# Altium PCB PCB.PcbDoc (part 1 of 3)
Units mm, origin at the board's own origin, x right, y up, seen from the top; angles counter-clockwise.
Board outline 103.89 x 68.2 mm, 6 copper layers (Top Layer, GND1, Internal 1, VCC, Internal 2, Bottom Layer), stack 0.851 mm thick; 117 components, 96 nets, 737 pads, 258 vias.
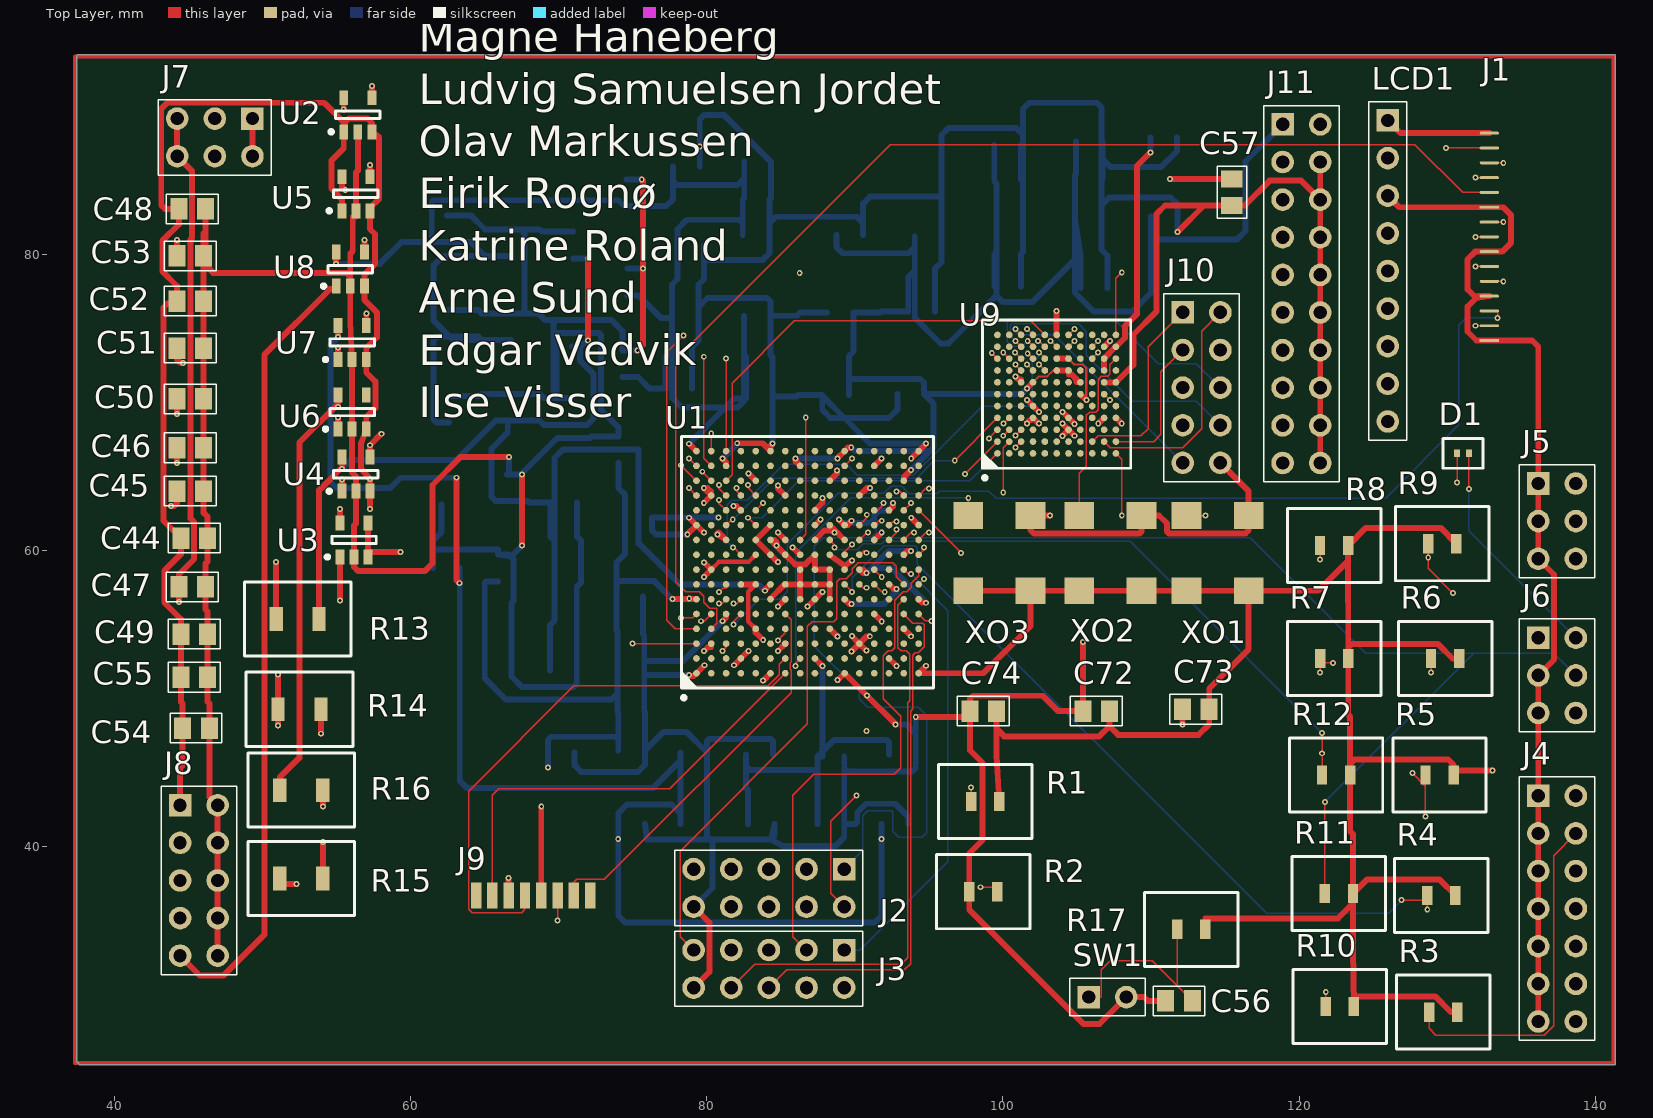
[diagram p0: Top Layer view]
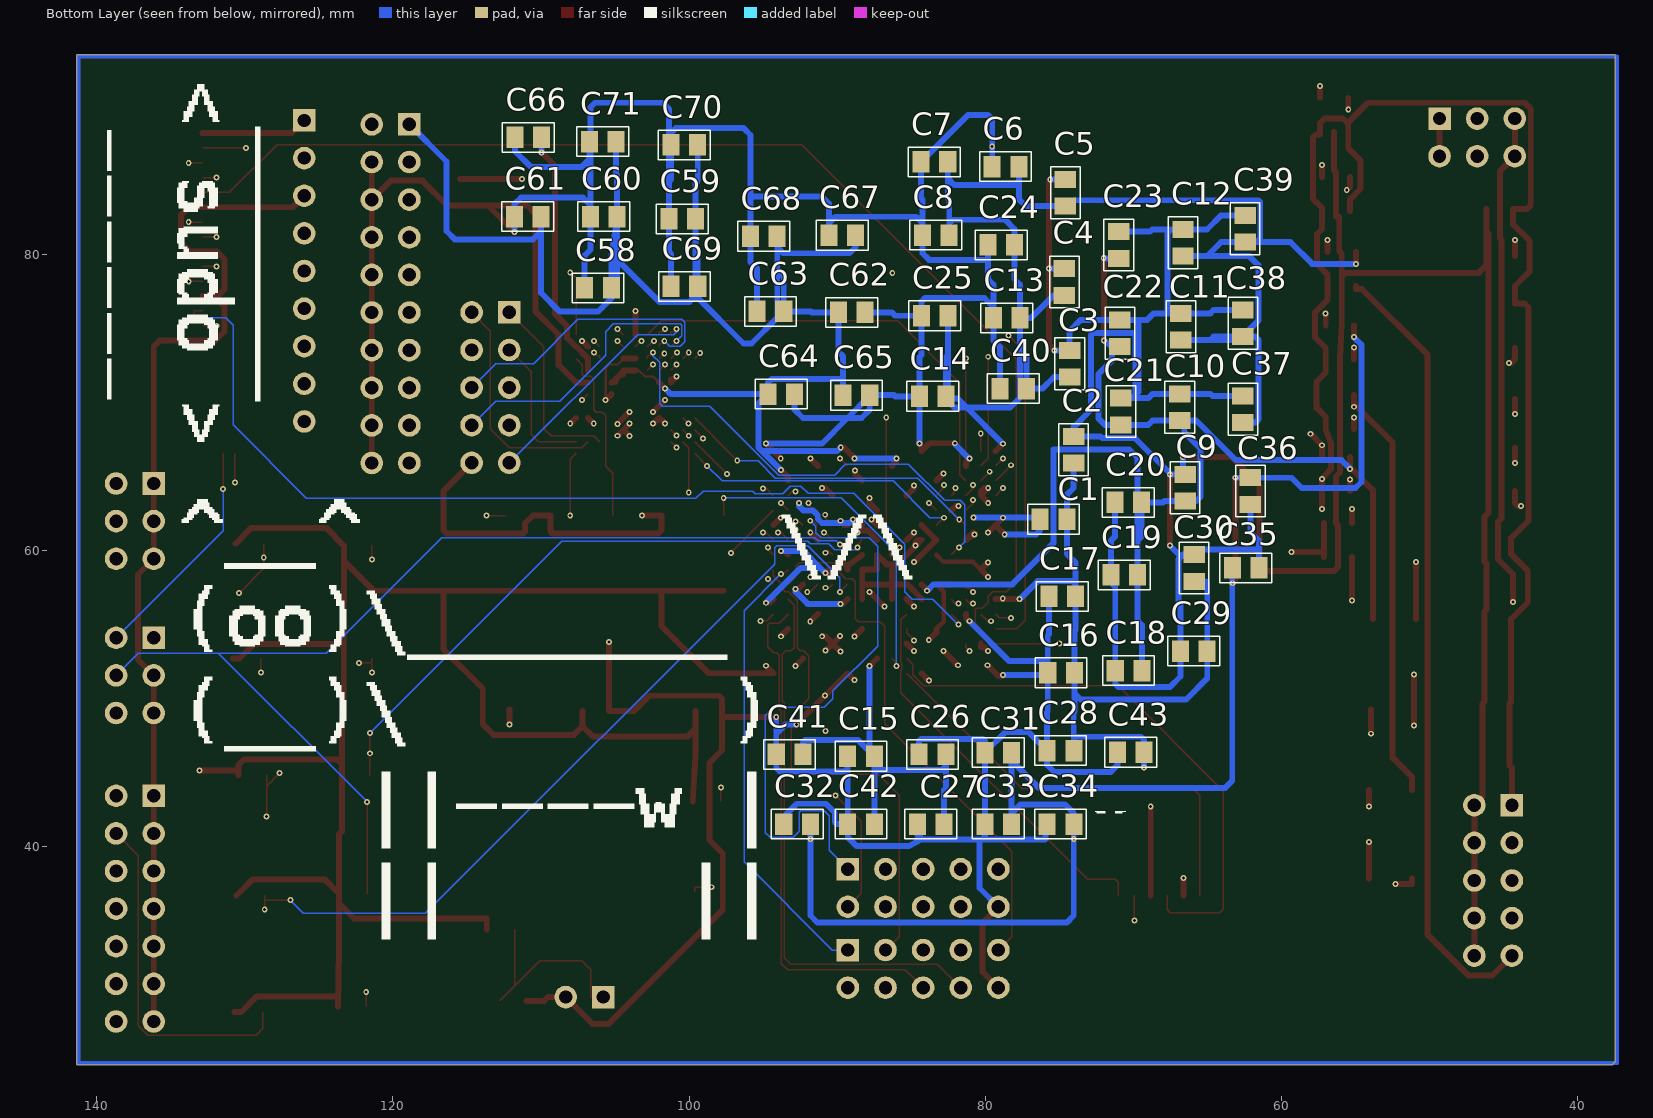
[diagram p1: Bottom Layer view, seen from below]
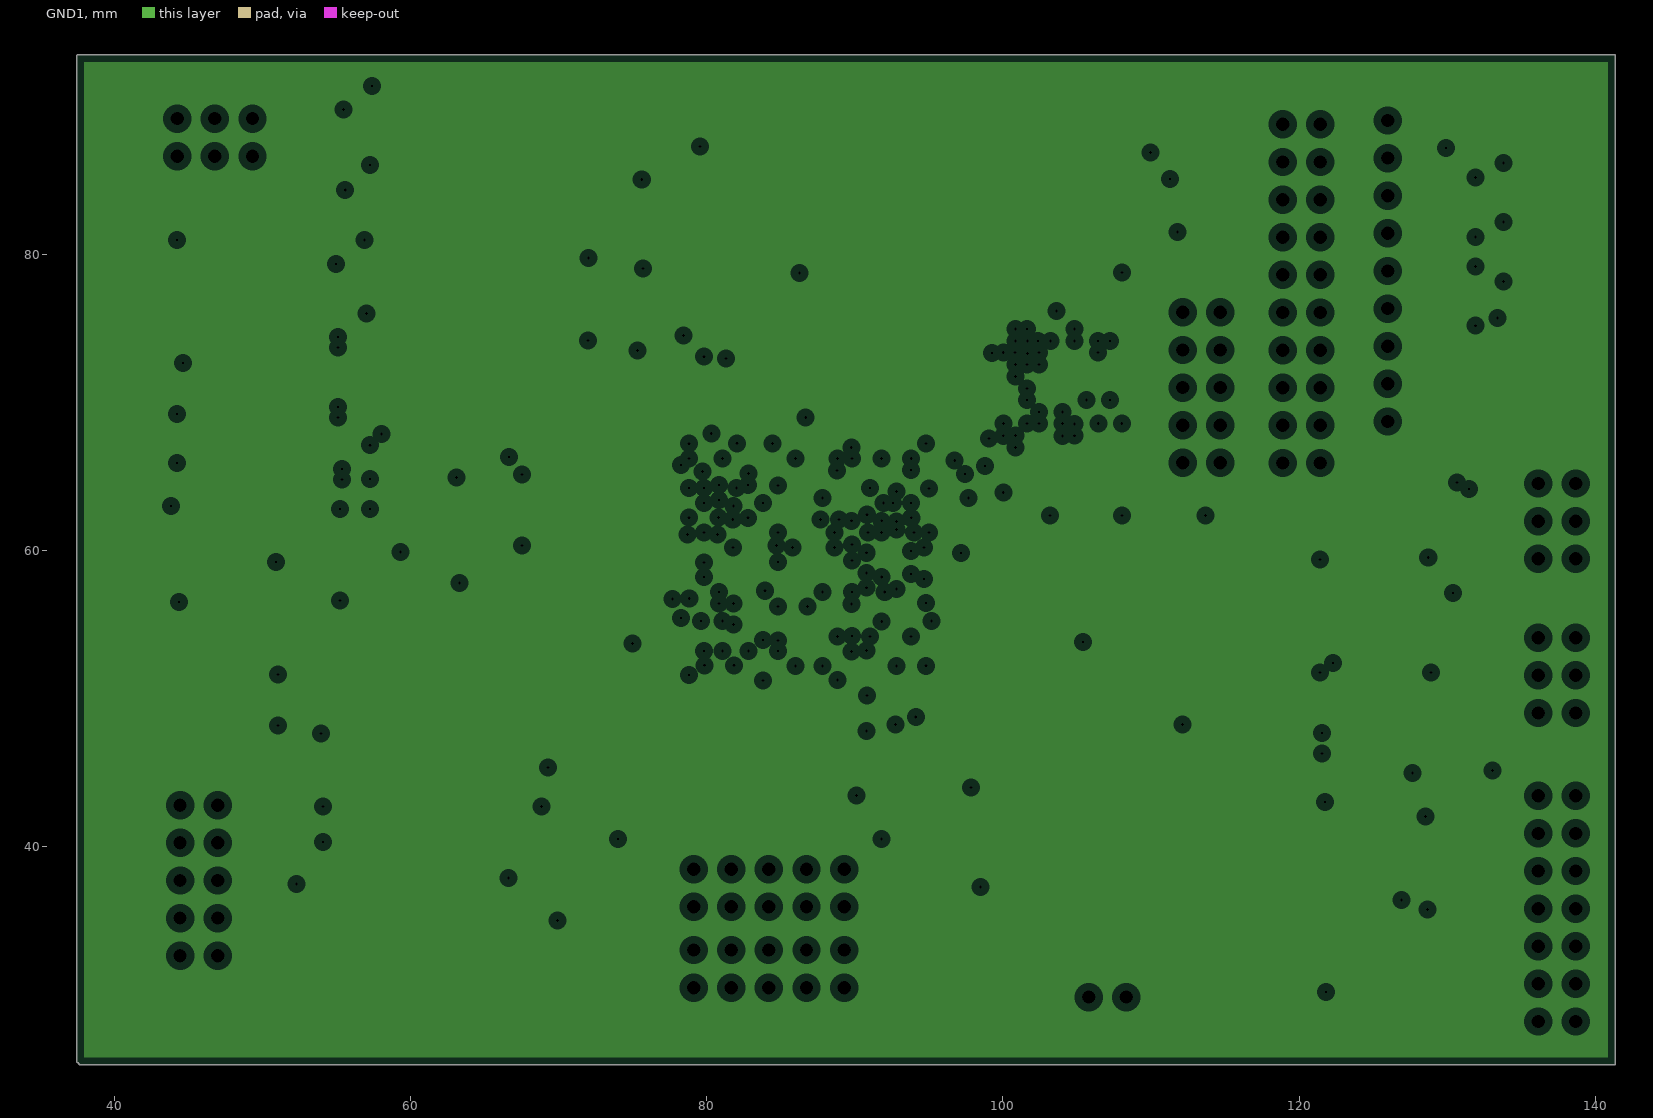
[diagram p2: GND1, clearances drawn from the general rule]
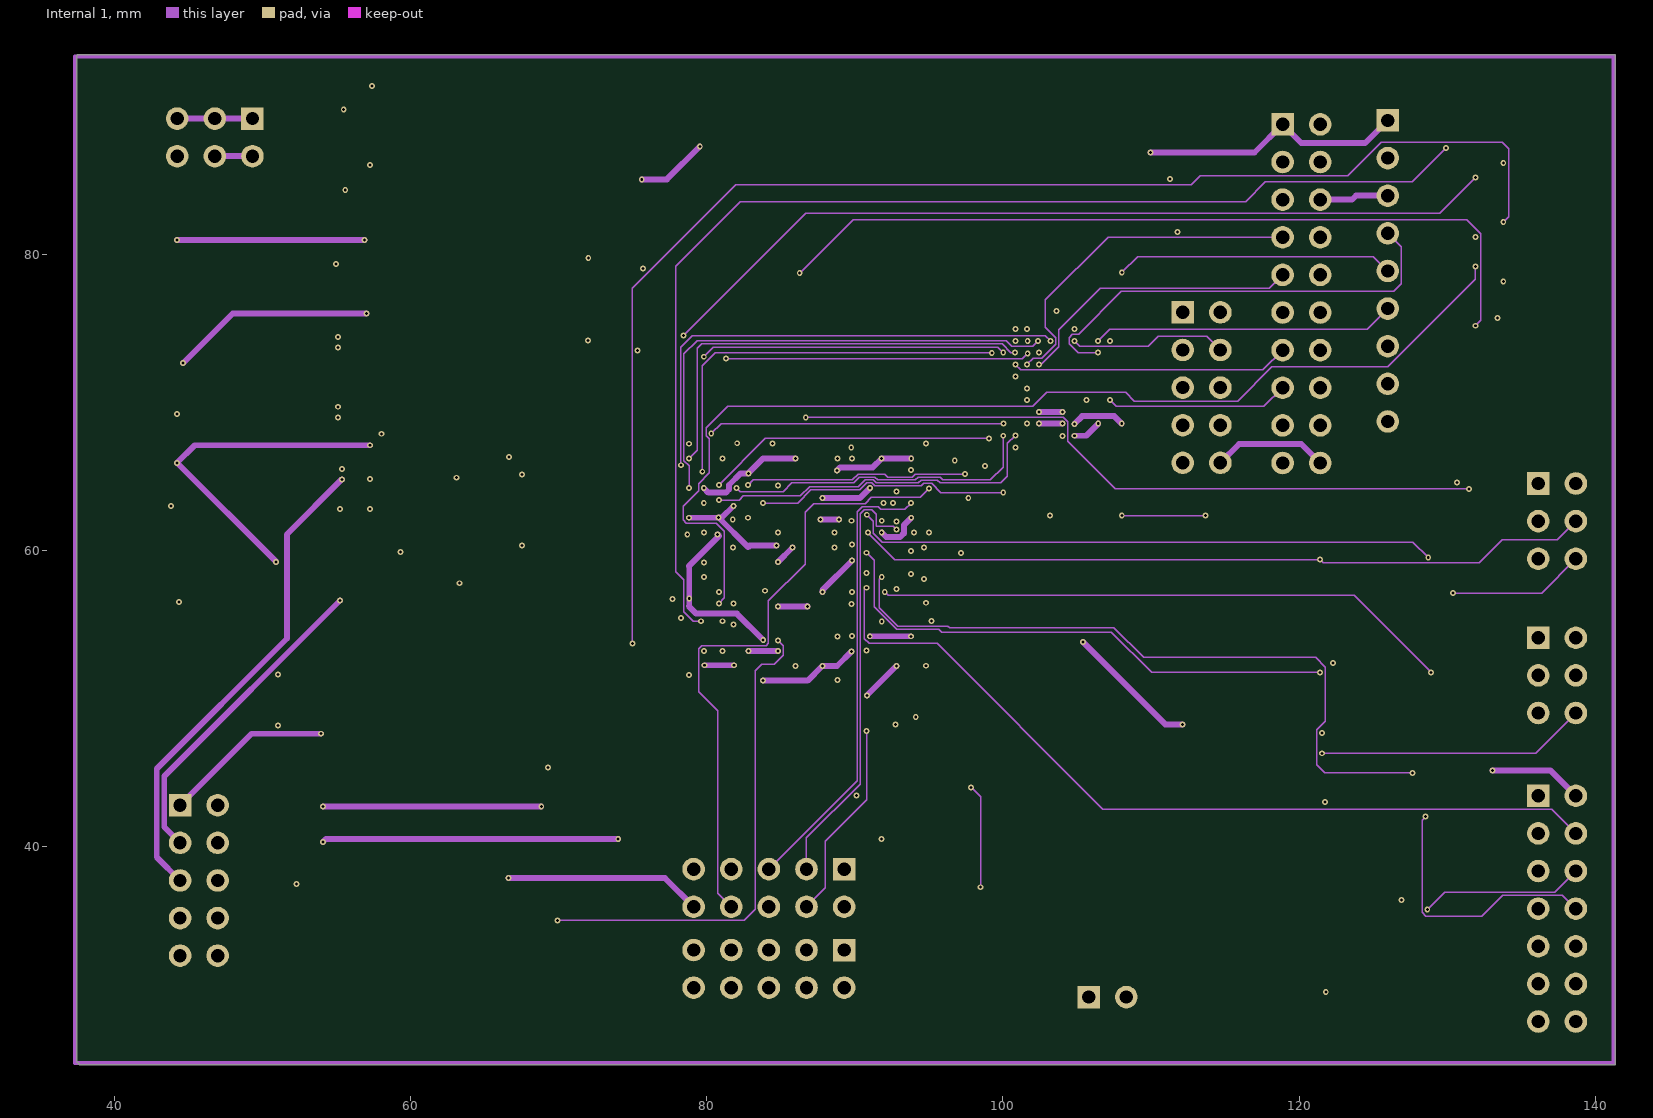
[diagram p3: Internal 1]
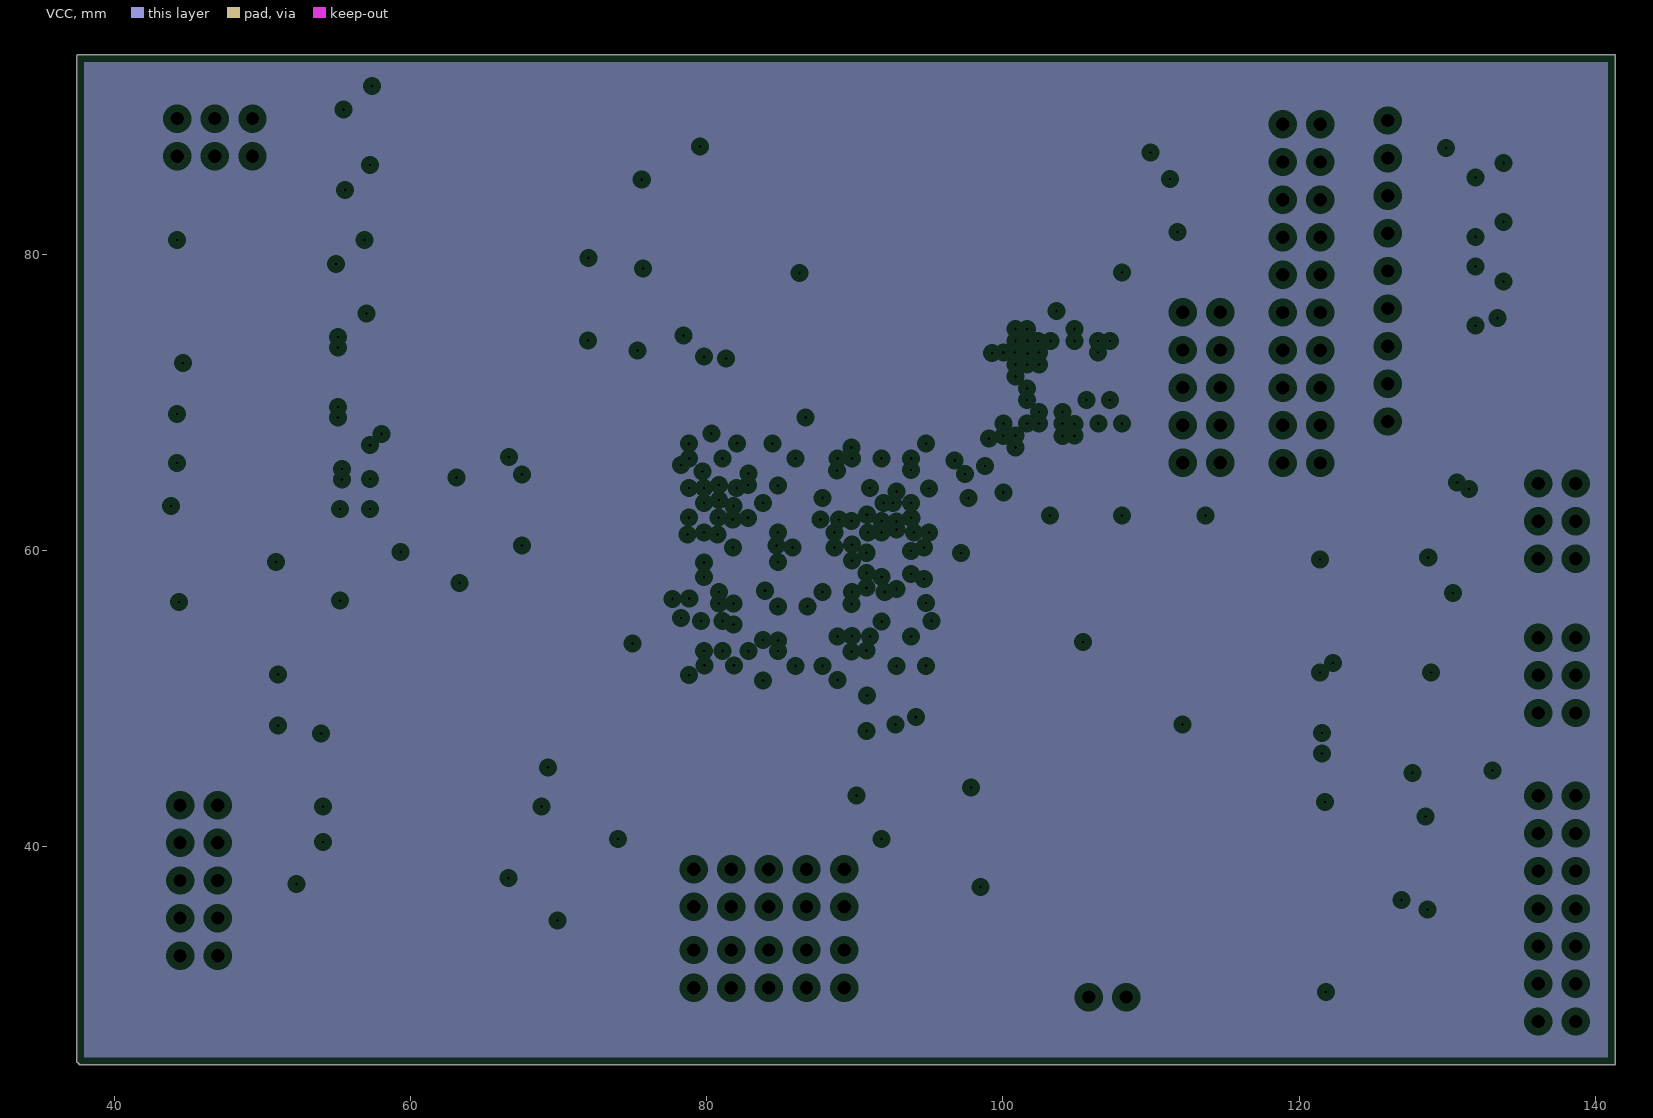
[diagram p4: VCC, clearances drawn from the general rule]
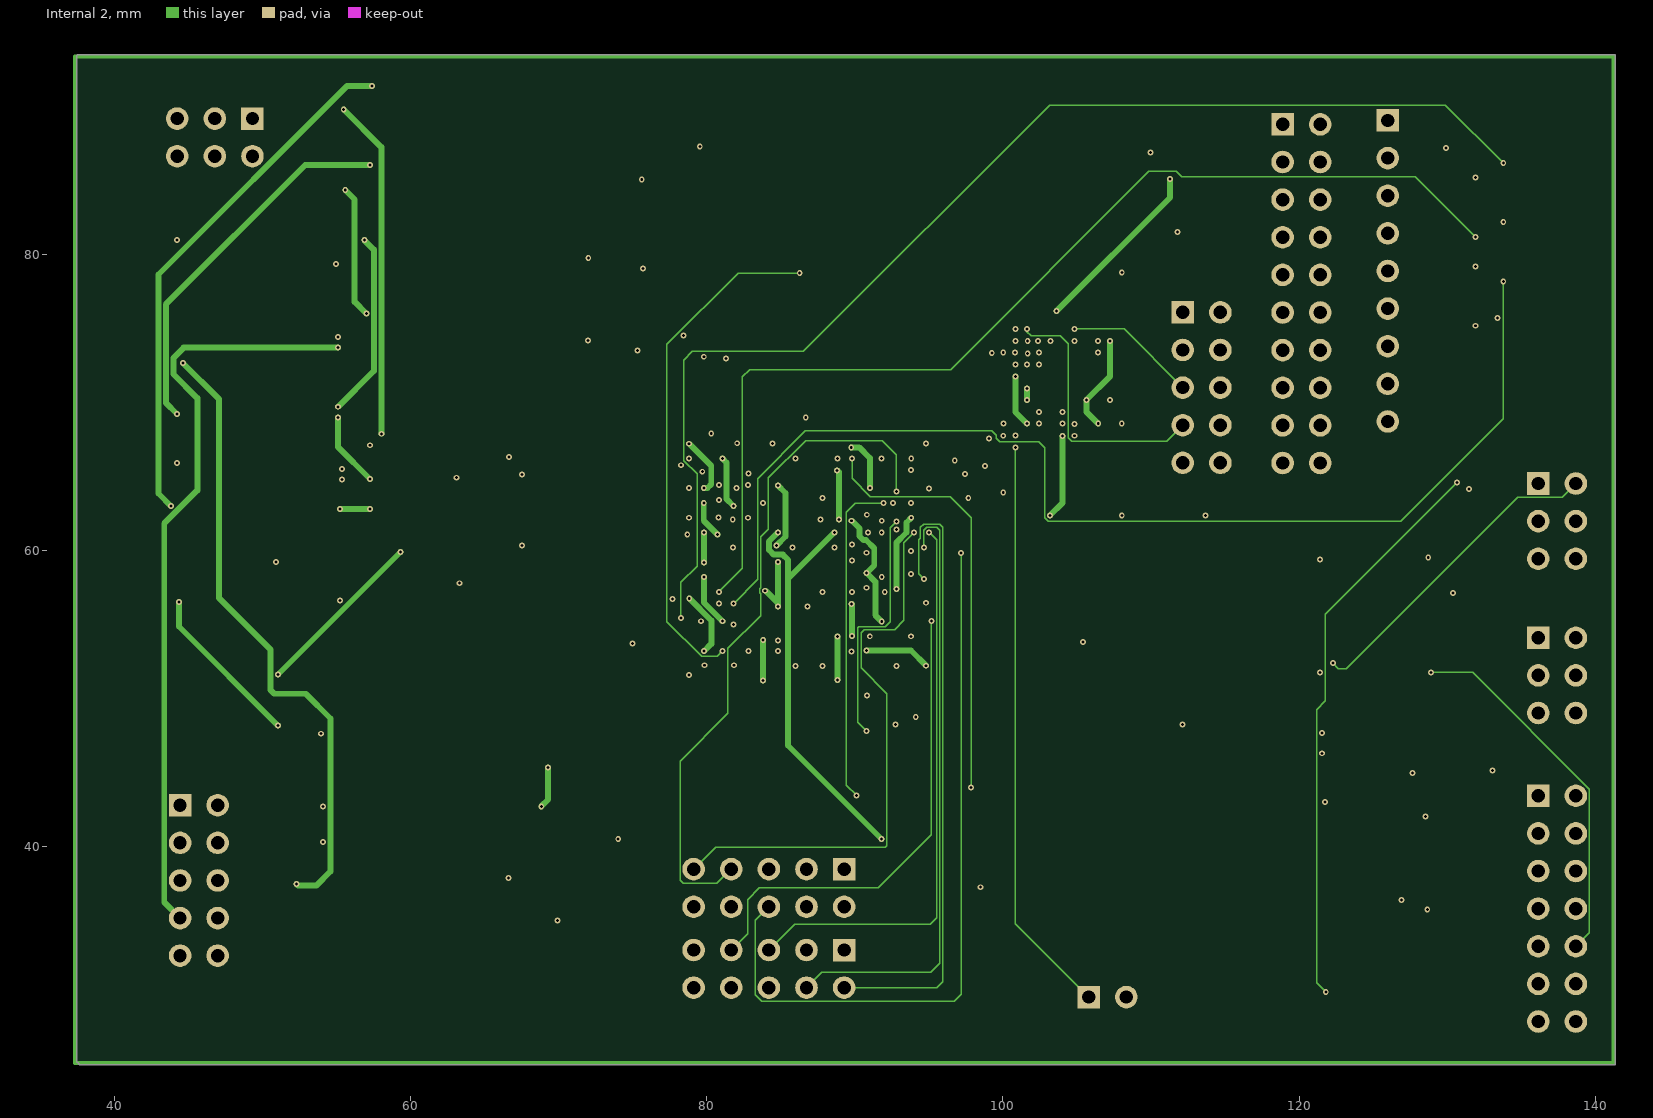
[diagram p5: Internal 2]

## Layer stack, top to bottom
Top Solder: solder mask 0.01, Solder Resist, Dk 3.5
Top Layer: signal copper 0.036
Dielectric 1: prepreg 0.127, FR-4, Dk 4.2
GND1: plane copper 0.036
Dielectric 2: prepreg 0.127, Dk 4.2
Internal 1: signal copper 0.036
Dielectric 3: prepreg 0.127, Dk 4.2
VCC: plane copper 0.036
Dielectric 5: prepreg 0.127, Dk 4.2
Internal 2: signal copper 0.036
Dielectric 6: prepreg 0.127, Dk 4.2
Bottom Layer: signal copper 0.036
Bottom Solder: solder mask 0.01, Solder Resist, Dk 3.5

## Board outline
37.592,25.4 cw(c37.592,25.527) 37.465,25.527 37.465,93.345 cw(c37.592,93.345) 37.592,93.473 141.351,93.473 141.351,25.273 37.719,25.273 cw(c37.719,25.4)

## Design rules (kind name [scope] priority, off if disabled: settings)
Clearance [All] p1: gap=0.1
HoleSize [All] p1: absolutevalues=TRUE maxlimit=3 minlimit=0.2 maxpercent=80.000 minpercent=20.000
HoleToHoleClearance [All] p1: gap=0.254 allowstackedmicrovias=FALSE
MinimumAnnularRing [All] p1: minimumring=0.1
MinimumSolderMaskSliver [All] p1: minsoldermaskwidth=0.03
PlaneClearance [All] p1: clearance=0.508
PlaneConnect [All] p1: planeconnectstyle=Relief reliefexpansion=0.508 reliefentries=4 reliefconductorwidth=0.254 reliefairgap=0.254
PolygonConnect [All] p1: connectstyle=Relief reliefconductorwidth=0.254 reliefentries=4 polygonreliefangle="90 Angle" airgapwidth=0.254
RoomDefinition dmpro16-pcb-v1-MCU-Power [InComponentClass('dmpro16-pcb-v1-MCU-Power')] p1: confinementstyle=ConfineIn formatcopy=TRUE lockcomponents=FALSE outline 85.852,68.707 114.035,68.707 114.035,91.186 85.852,91.186
RoomDefinition dmpro16-pcb-v1-FPGA-Power [InComponentClass('dmpro16-pcb-v1-FPGA-Power')] p2: confinementstyle=ConfineIn formatcopy=TRUE lockcomponents=FALSE outline 96.266,39.116 96.266,91.948 60.579,91.948 60.579,39.116
RoomDefinition dmpro16-pcb-v1-CameraBoard [InComponentClass('dmpro16-pcb-v1-CameraBoard')] p3: confinementstyle=ConfineIn formatcopy=TRUE lockcomponents=FALSE outline 131.953,71.12 139.573,71.12 139.573,92.075 131.953,92.075
RoomDefinition dmpro16-pcb-v1-UserInput [InComponentClass('dmpro16-pcb-v1-UserInput')] p4: confinementstyle=ConfineIn formatcopy=TRUE lockcomponents=FALSE outline 118.745,39.116 103.505,39.116 103.505,26.3 118.745,26.3
RoomDefinition dmpro16-pcb-v1-SystemClock [InComponentClass('dmpro16-pcb-v1-SystemClock')] p5: confinementstyle=ConfineIn formatcopy=TRUE lockcomponents=FALSE outline 96.404,45.974 118.491,45.974 118.491,63.881 96.404,63.881
RoomDefinition dmpro16-pcb-v1-SDcard [InComponentClass('dmpro16-pcb-v1-SDcard')] p6: confinementstyle=ConfineIn formatcopy=TRUE lockcomponents=FALSE outline 62.738,25.4 75.184,25.4 75.184,40.386 62.738,40.386
RoomDefinition dmpro16-pcb-v1-PowerSupply [InComponentClass('dmpro16-pcb-v1-PowerSupply')] p7: confinementstyle=ConfineIn formatcopy=TRUE lockcomponents=FALSE outline 58.293,27.94 58.293,92.336 37.78,92.336 37.78,27.94
RoomDefinition dmpro16-pcb-v1-MCU-GPIO [InComponentClass('dmpro16-pcb-v1-MCU-GPIO')] p8: confinementstyle=ConfineIn formatcopy=TRUE lockcomponents=FALSE outline 123.329,64.25 123.329,90.678 97.79,90.678 97.79,64.25
RoomDefinition dmpro16-pcb-v1-FPGA-Config [InComponentClass('dmpro16-pcb-v1-FPGA-Config')] p9: confinementstyle=ConfineIn formatcopy=TRUE lockcomponents=FALSE outline 140.843,25.781 140.843,70.485 118.491,70.485 118.491,25.781
RoomDefinition dmpro16-pcb-v1-FPGA-Bank14 [InComponentClass('dmpro16-pcb-v1-FPGA-Bank14')] p10: confinementstyle=ConfineIn formatcopy=TRUE lockcomponents=FALSE outline 102.743,28.956 102.743,69.215 75.057,69.215 75.057,28.956
RoomDefinition dmpro16-pcb-v1-DisplayBoard [InComponentClass('dmpro16-pcb-v1-DisplayBoard')] p11: confinementstyle=ConfineIn formatcopy=TRUE lockcomponents=FALSE outline 127.508,91.186 123.571,91.186 123.571,64.643 127.508,64.643
RoutingVias [All] p1: holewidth=0.2 width=0.4 viastyle="Through Hole" minholewidth=0.2 minwidth=1.4 maxholewidth=1 maxwidth=3
SilkToSilkClearance [All] p1: silktosilkclearance=0
SilkToSolderMaskClearance [IsPad] p1: minsilkscreentomaskgap=0.1 clearancetoexposedcopper=TRUE
SolderMaskExpansion [All] p1: expansion=0.102
Width WidthPower [InNetClass('Power')] p1: maxlimit=0.5 minlimit=0.1 preferedwidth=0.4
Width [All] p2: maxlimit=5 minlimit=0.1 preferedwidth=0.1 minimp=50.000000 maximp=50.000000 favimp=50.000000
23 further rules are at their usual default settings.

## Classes and differential pairs
net class Power: GND ISENS_1V0 ISENS_1V8 ISENS_3V3 ISENS_UNREG NetC45_2 NetC46_2 NetC50_2 NetC51_2 NetC53_2 NetC57_2 V_UNREG VCC_1V0 VCC_1V8 VCC_3V3 VCC_IN
net class TP3-[1..9]: TP3-1 TP3-2 TP3-3 TP3-4 TP3-5 TP3-6 TP3-7 TP3-8 TP3-9
net class TP2-[1..9]: TP2-1 TP2-2 TP2-3 TP2-4 TP2-5 TP2-6 TP2-7 TP2-8 TP2-9
net class TP1-[1..9]: TP1-1 TP1-2 TP1-3 TP1-4 TP1-5 TP1-6 TP1-7 TP1-8 TP1-9
component class dmpro16-pcb-v1-UserInput: C56 R17 SW1
component class dmpro16-pcb-v1-SystemClock: C72 C73 C74 XO1 XO2 XO3
component class dmpro16-pcb-v1-SDcard: J9
component class dmpro16-pcb-v1-PowerSupply: C44 C45 C46 C47 C48 C49 C50 C51 C52 C53 C54 C55 J7 J8 R13 R14 R15 R16 U2 U3 U4 U5 U6 U7 U8
component class dmpro16-pcb-v1-MCU-Power: C58 C59 C60 C61 C62 C63 C64 C65 C66 C67 C68 C69 C70 C71
component class dmpro16-pcb-v1-MCU-GPIO: C57 J10 J11 U9
component class dmpro16-pcb-v1-FPGA-Power: C1 C2 C3 C4 C5 C6 C7 C8 C9 C10 C11 C12 C13 C14 C15 C16 C17 C18 C19 C20 C21 C22 C23 C24 C25 C26 C27 C28 C29 C30 C31 C32 C33 C34 C35 C36 C37 C38 C39 C40 C41 C42 C43
component class dmpro16-pcb-v1-FPGA-Config: D1 J4 J5 J6 R3 R4 R5 R6 R7 R8 R9 R10 R11 R12
component class dmpro16-pcb-v1-FPGA-Bank14: J2 J3 R1 R2
component class dmpro16-pcb-v1-DisplayBoard: LCD1
component class dmpro16-pcb-v1-CameraBoard: J1

## Components (designator, comment, footprint, x,y, rotation, side; value= is the part's Value field where it differs from the comment)
C1 "#NAME?" CAPC2012_0h50 75.402,62.1 r180 bottom
C2 "#NAME?" CAPC2012_0h50 74.041,66.802 r270 bottom
C3 "#NAME?" CAPC2012_0h50 74.3,72.61 r270 bottom
C4 "#NAME?" CAPC2012_0h50 74.667,78.121 r270 bottom
C5 "#NAME?" CAPC2012_0h50 74.594,84.148 r270 bottom
C6 "#NAME?" CAPC2012_0h50 78.636,85.912 r180 bottom
C7 "#NAME?" CAPC2012_0h50 83.439,86.233 r180 bottom
C8 "#NAME?" CAPC2012_0h50 83.339,81.282 r180 bottom
C9 "#NAME?" CAPC2012_0h50 66.51,64.232 r270 bottom
C10 "#NAME?" CAPC2012_0h50 66.877,69.67 r270 bottom
C11 "#NAME?" CAPC2012_0h50 66.804,75.108 r270 bottom
C12 "#NAME?" CAPC2012_0h50 66.657,80.767 r270 bottom
C13 "#NAME?" CAPC2012_0h50 78.562,75.696 r180 bottom
C14 "#NAME?" CAPC2012_0h50 83.56,70.405 r180 bottom
C15 "#NAME?" CAPC2012_0h50 88.392,46.101 r180 bottom
C16 "#NAME?" CAPC2012_0h50 74.888,51.738 r180 bottom
C17 "#NAME?" CAPC2012_0h50 74.803,56.896 r180 bottom
C18 "#NAME?" CAPC2012_0h50 70.331,51.885 r180 bottom
C19 "#NAME?" CAPC2012_0h50 70.625,58.352 r180 bottom
C20 "#NAME?" CAPC2012_0h50 70.358,63.246 r180 bottom
C21 "#NAME?" CAPC2012_0h50 70.846,69.376 r270 bottom
C22 "#NAME?" CAPC2012_0h50 70.919,74.667 r270 bottom
C23 "#NAME?" CAPC2012_0h50 70.993,80.62 r270 bottom
C24 "#NAME?" CAPC2012_0h50 78.93,80.62 r180 bottom
C25 "#NAME?" CAPC2012_0h50 83.413,75.843 r180 bottom
C26 "#NAME?" CAPC2012_0h50 83.566,46.228 r180 bottom
C27 "#NAME?" CAPC2012_0h50 83.693,41.529 r180 bottom
C28 "#NAME?" CAPC2012_0h50 74.93,46.482 r180 bottom
C29 "#NAME?" CAPC2012_0h50 65.922,53.208 r180 bottom
C30 "#NAME?" CAPC2012_0h50 65.913,58.812 r270 bottom
C31 "#NAME?" CAPC2012_0h50 79.121,46.355 r180 bottom
C32 "#NAME?" CAPC2012_0h50 92.71,41.529 r180 bottom
C33 "#NAME?" CAPC2012_0h50 79.121,41.529 r180 bottom
C34 "#NAME?" CAPC2012_0h50 74.93,41.529 r180 bottom
C35 "#NAME?" CAPC2012_0h50 62.43,58.818 r0 bottom
C36 "#NAME?" CAPC2012_0h50 62.103,64.008 r90 bottom
C37 "#NAME?" CAPC2012_0h50 62.615,69.523 r270 bottom
C38 "#NAME?" CAPC2012_0h50 62.615,75.329 r270 bottom
C39 "#NAME?" CAPC2012_0h50 62.468,81.723 r270 bottom
C40 "#NAME?" CAPC2012_0h50 78.121,70.919 r180 bottom
C41 "#NAME?" CAPC2012_0h50 93.218,46.228 r180 bottom
C42 "#NAME?" CAPC2012_0h50 88.392,41.529 r180 bottom
C43 "#NAME?" CAPC2012_0h50 70.184,46.373 r180 bottom
C44 "#NAME?" CAPC2012_0h50 45.4,60.833 r180 top
C45 "#NAME?" CAPC2012_0h50 45.146,64.008 r180 top
C46 "#NAME?" CAPC2012_0h50 45.146,66.929 r180 top
C47 "#NAME?" CAPC2012_0h50 45.273,57.531 r180 top
C48 "#NAME?" CAPC2012_0h50 45.273,83.058 r180 top
C49 "#NAME?" CAPC2012_0h50 45.4,54.356 r180 top
C50 "#NAME?" CAPC2012_0h50 45.146,70.231 r180 top
C51 "#NAME?" CAPC2012_0h50 45.146,73.66 r180 top
C52 "#NAME?" CAPC2012_0h50 45.146,76.835 r180 top
C53 "#NAME?" CAPC2012_0h50 45.146,79.883 r180 top
C54 "#NAME?" CAPC2012_0h50 45.527,48.006 r180 top
C55 "#NAME?" CAPC2012_0h50 45.4,51.435 r180 top
C56 "#NAME?" CAPC2012_0h50 111.887,29.591 r0 top
C57 "#NAME?" CAPC2012_0h50 115.455,84.189 r90 top
C58 "#NAME?" CAPC2012_0h50 106.15,77.724 r180 bottom
C59 "#NAME?" CAPC2012_0h50 100.463,82.384 r180 bottom
C60 "#NAME?" CAPC2012_0h50 105.754,82.531 r180 bottom
C61 "#NAME?" CAPC2012_0h50 110.899,82.531 r180 bottom
C62 "#NAME?" CAPC2012_0h50 89.027,76.073 r0 bottom
C63 "#NAME?" CAPC2012_0h50 94.51,76.137 r180 bottom
C64 "#NAME?" CAPC2012_0h50 93.775,70.552 r0 bottom
C65 "#NAME?" CAPC2012_0h50 88.704,70.478 r0 bottom
C66 "#NAME?" CAPC2012_0h50 110.86,87.884 r180 bottom
C67 "#NAME?" CAPC2012_0h50 89.662,81.28 r180 bottom
C68 "#NAME?" CAPC2012_0h50 94.951,81.208 r180 bottom
C69 "#NAME?" CAPC2012_0h50 100.316,77.828 r180 bottom
C70 "#NAME?" CAPC2012_0h50 100.319,87.376 r180 bottom
C71 "#NAME?" CAPC2012_0h50 105.828,87.602 r180 bottom
C72 "#NAME?" CAPC2012_0h50 106.299,49.149 r0 top
C73 "#NAME?" CAPC2012_0h50 113.03,49.276 r0 top
C74 "#NAME?" CAPC2012_0h50 98.679,49.149 r0 top
D1 "LED" LED 131.064,66.548 r180 top
J1 "Header 1x15pin" ZIF-15 132.842,74.168 r90 top
J2 "Testpoints #2" HEADER_2X5 89.281,38.481 r180 top
J3 "Testpoints #3" HEADER_2X5 89.281,33.02 r180 top
J4 "FPGA JTAG" HEADER_2X7 136.144,43.434 r270 top
J5 "FPGA Config Mode" HEADER_2X3 136.144,64.516 r270 top
J6 "FPGA Status" HEADER_2X3 136.144,54.102 r270 top
J7 "Power input" HEADER_2X3 49.337,89.154 r180 top
J8 "Current sense hdr" HEADER_2X5 44.45,42.799 r270 top
J9 "microSD" 114-00841-68-1-ND 72.136,36.703 r0 top
J10 "Testpoints #1" HEADER_2X5 112.141,76.073 r270 top
J11 "Header 2x10pin" HEADER_2X10 118.884,88.761 r270 top
LCD1 "eINK Display" HEADER_1X9 125.984,89.027 r270 top
R1 "10 kOhm" "Resistor 2012" 98.806,43.053 r180 top
R2 "10 kOhm" "Resistor 2012" 98.679,36.957 r180 top
R3 "10 kOhm" "Resistor 2012" 129.728,28.829 r180 top
R4 "10 kOhm" "Resistor 2012" 129.601,36.703 r180 top
R5 "10 kOhm" "Resistor 2012" 129.479,44.831 r180 top
R6 "10 kOhm" "Resistor 2012" 129.855,52.705 r180 top
R7 "10 kOhm" "Resistor 2012" 122.367,52.705 r180 top
R8 "10 kOhm" "Resistor 2012" 122.362,60.325 r180 top
R9 "10 kOhm" "Resistor 2012" 129.667,60.452 r180 top
R10 "150 Ohm" "Resistor 2012" 122.748,29.21 r180 top
R11 "10 kOhm" "Resistor 2012" 122.682,36.83 r180 top
R12 "10 kOhm" "Resistor 2012" 122.494,44.831 r180 top
R13 "" "Resistor 3216" 52.385,55.372 r180 top
R14 "" "Resistor 3216" 52.512,49.276 r180 top
R15 "" "Resistor 3216" 52.639,37.846 r180 top
R16 "" "Resistor 3216" 52.639,43.815 r180 top
R17 "10 kOhm" "Resistor 2012" 112.71,34.417 r180 top
SW1 "SPST Push Button" HEADER_1X2 105.791,29.845 r0 top
U1 "XC7A35T-2FTG256C" FTG256 86.812,59.206 r90 top
U2 "LDK130 1.0V LDO" SOT23-5-127P600-8N 56.449,89.408 r90 top
U3 "INA196/197/198" SOT23-5-127P600-8N 56.195,60.706 r90 top
U4 "INA196/197/198" SOT23-5-127P600-8N 56.322,65.151 r90 top
U5 "LDK130 1.8V LDO" SOT23-5-127P600-8N 56.322,84.074 r90 top
U6 "LDK220 3.3V LDO" SOT23-5-127P600-8N 56.068,69.342 r90 top
U7 "INA196/197/198" SOT23-5-127P600-8N 56.068,74.041 r90 top
U8 "INA196/197/198" SOT23-5-127P600-8N 55.941,78.994 r90 top
U9 "EFM32GG990F1024-BGA112" ENMR-BGA112 103.632,70.548 r90 top
XO1 "32.768kHz oscillator" FXO-HC73 117.611,56.388 r180 top
XO2 "48MHz oscillator" FXO-HC73 110.372,56.388 r180 top
XO3 "48MHz oscillator" FXO-HC73 102.879,56.388 r180 top

## Footprints (in the part's own frame and the unit in brackets; to place one, negate y for a bottom-side part, rotate by r counter-clockwise, add the part's x,y. Pads: shape width x height; smd on the part's side, far side on the other; paste and mask are expansions set on the pad)
114-00841-68-1-ND [mm]
  rect 0.7x1.75 smd: 1(0,0) 2(-1.1,0) 3(-2.2,0) 4(-3.3,0) 5(-4.4,0) 6(-5.5,0) 7(-6.6,0) 8(-7.7,0)
  body extent -9.22,-11.12 2.8,0.38, height 0.05
CAPC2012_0h50 [mm]
  rect 1.15x1.45 smd: 1(-0.9,0) 2(0.9,0)
  silkscreen extent -1.75,-1 1.75,1, body extent -1,-0.62 1,0.63, height 0.5
ENMR-BGA112 [mm] "BGA, 112-Balls, Body 10x10mm, Pitch 0.8mm"
  round 0.45 smd: A1(-4,4) A2(-3.2,4) A3(-2.4,4) A4(-1.6,4) A5(-0.8,4) A6(0,4) A7(0.8,4) A8(1.6,4) A9(2.4,4) A10(3.2,4) A11(4,4) B1(-4,3.2) B2(-3.2,3.2) B3(-2.4,3.2) B4(-1.6,3.2) B5(-0.8,3.2) B6(0,3.2) B7(0.8,3.2) B8(1.6,3.2) B9(2.4,3.2) B10(3.2,3.2) B11(4,3.2) C1(-4,2.4) C2(-3.2,2.4) C3(-2.4,2.4) C4(-1.6,2.4) C5(-0.8,2.4) C6(0,2.4) C7(0.8,2.4) C8(1.6,2.4) C9(2.4,2.4) C10(3.2,2.4) C11(4,2.4) D1(-4,1.6) D2(-3.2,1.6) D3(-2.4,1.6) D4(-1.6,1.6) D5(-0.8,1.6) D6(0,1.6) D7(0.8,1.6) D8(1.6,1.6) D9(2.4,1.6) D10(3.2,1.6) D11(4,1.6) E1(-4,0.8) E2(-3.2,0.8) E3(-2.4,0.8) E4(-1.6,0.8) E5(-0.8,0.8) E6(0,0.8) E7(0.8,0.8) E8(1.6,0.8) E9(2.4,0.8) E10(3.2,0.8) E11(4,0.8) F1(-4,0) F2(-3.2,0) F3(-2.4,0) F4(-1.6,0) F5(-0.8,0) F6(0,0) F7(0.8,0) F8(1.6,0) F9(2.4,0) F10(3.2,0) F11(4,0) G1(-4,-0.8) G2(-3.2,-0.8) G3(-2.4,-0.8) G4(-1.6,-0.8) G5(-0.8,-0.8) G6(0,-0.8) G7(0.8,-0.8) G8(1.6,-0.8) G9(2.4,-0.8) G10(3.2,-0.8) G11(4,-0.8) H1(-4,-1.6) H2(-3.2,-1.6) H3(-2.4,-1.6) H4(-1.6,-1.6) H5(-0.8,-1.6) H6(0,-1.6) H7(0.8,-1.6) H8(1.6,-1.6) H9(2.4,-1.6) H10(3.2,-1.6) H11(4,-1.6) J1(-4,-2.4) J2(-3.2,-2.4) J3(-2.4,-2.4) J4(-1.6,-2.4) J5(-0.8,-2.4) J6(0,-2.4) J7(0.8,-2.4) J8(1.6,-2.4) J9(2.4,-2.4) J10(3.2,-2.4) J11(4,-2.4) K1(-4,-3.2) K2(-3.2,-3.2) K3(-2.4,-3.2) K4(-1.6,-3.2) K5(-0.8,-3.2) K6(0,-3.2) K7(0.8,-3.2) K8(1.6,-3.2) K9(2.4,-3.2) K10(3.2,-3.2) K11(4,-3.2) L1(-4,-4) L2(-3.2,-4) L3(-2.4,-4) L4(-1.6,-4) L5(-0.8,-4) L6(0,-4) L7(0.8,-4) L8(1.6,-4) L9(2.4,-4) L10(3.2,-4) L11(4,-4)
  silkscreen extent -5.77,-5 5,5, body extent -5,-5 5,5, height 1.3
FTG256 [mm] "BGA, 256-Balls, Body 17x17mm, Pitch 1mm"
  round 0.45 smd: A1(-7.5,7.5) A2(-6.5,7.5) A3(-5.5,7.5) A4(-4.5,7.5) A5(-3.5,7.5) A6(-2.5,7.5) A7(-1.5,7.5) A8(-0.5,7.5) A9(0.5,7.5) A10(1.5,7.5) A11(2.5,7.5) A12(3.5,7.5) A13(4.5,7.5) A14(5.5,7.5) A15(6.5,7.5) A16(7.5,7.5) B1(-7.5,6.5) B2(-6.5,6.5) B3(-5.5,6.5) B4(-4.5,6.5) B5(-3.5,6.5) B6(-2.5,6.5) B7(-1.5,6.5) B8(-0.5,6.5) B9(0.5,6.5) B10(1.5,6.5) B11(2.5,6.5) B12(3.5,6.5) B13(4.5,6.5) B14(5.5,6.5) B15(6.5,6.5) B16(7.5,6.5) C1(-7.5,5.5) C2(-6.5,5.5) C3(-5.5,5.5) C4(-4.5,5.5) C5(-3.5,5.5) C6(-2.5,5.5) C7(-1.5,5.5) C8(-0.5,5.5) C9(0.5,5.5) C10(1.5,5.5) C11(2.5,5.5) C12(3.5,5.5) C13(4.5,5.5) C14(5.5,5.5) C15(6.5,5.5) C16(7.5,5.5) D1(-7.5,4.5) D2(-6.5,4.5) D3(-5.5,4.5) D4(-4.5,4.5) D5(-3.5,4.5) D6(-2.5,4.5) D7(-1.5,4.5) D8(-0.5,4.5) D9(0.5,4.5) D10(1.5,4.5) D11(2.5,4.5) D12(3.5,4.5) D13(4.5,4.5) D14(5.5,4.5) D15(6.5,4.5) D16(7.5,4.5) E1(-7.5,3.5) E2(-6.5,3.5) E3(-5.5,3.5) E4(-4.5,3.5) E5(-3.5,3.5) E6(-2.5,3.5) E7(-1.5,3.5) E8(-0.5,3.5) E9(0.5,3.5) E10(1.5,3.5) E11(2.5,3.5) E12(3.5,3.5) E13(4.5,3.5) E14(5.5,3.5) E15(6.5,3.5) E16(7.5,3.5) F1(-7.5,2.5) F2(-6.5,2.5) F3(-5.5,2.5) F4(-4.5,2.5) F5(-3.5,2.5) F6(-2.5,2.5) F7(-1.5,2.5) F8(-0.5,2.5) F9(0.5,2.5) F10(1.5,2.5) F11(2.5,2.5) F12(3.5,2.5) F13(4.5,2.5) F14(5.5,2.5) F15(6.5,2.5) F16(7.5,2.5) G1(-7.5,1.5) G2(-6.5,1.5) G3(-5.5,1.5) G4(-4.5,1.5) G5(-3.5,1.5) G6(-2.5,1.5) G7(-1.5,1.5) G8(-0.5,1.5) G9(0.5,1.5) G10(1.5,1.5) G11(2.5,1.5) G12(3.5,1.5) G13(4.5,1.5) G14(5.5,1.5) G15(6.5,1.5) G16(7.5,1.5) H1(-7.5,0.5) H2(-6.5,0.5) H3(-5.5,0.5) H4(-4.5,0.5) H5(-3.5,0.5) H6(-2.5,0.5) H7(-1.5,0.5) H8(-0.5,0.5) H9(0.5,0.5) H10(1.5,0.5) H11(2.5,0.5) H12(3.5,0.5) H13(4.5,0.5) H14(5.5,0.5) H15(6.5,0.5) H16(7.5,0.5) J1(-7.5,-0.5) J2(-6.5,-0.5) J3(-5.5,-0.5) J4(-4.5,-0.5) J5(-3.5,-0.5) J6(-2.5,-0.5) J7(-1.5,-0.5) J8(-0.5,-0.5) J9(0.5,-0.5) J10(1.5,-0.5) J11(2.5,-0.5) J12(3.5,-0.5) J13(4.5,-0.5) J14(5.5,-0.5) J15(6.5,-0.5) J16(7.5,-0.5) K1(-7.5,-1.5) K2(-6.5,-1.5) K3(-5.5,-1.5) K4(-4.5,-1.5) K5(-3.5,-1.5) K6(-2.5,-1.5) K7(-1.5,-1.5) K8(-0.5,-1.5) K9(0.5,-1.5) K10(1.5,-1.5) K11(2.5,-1.5) K12(3.5,-1.5) K13(4.5,-1.5) K14(5.5,-1.5) K15(6.5,-1.5) K16(7.5,-1.5) L1(-7.5,-2.5) L2(-6.5,-2.5) L3(-5.5,-2.5) L4(-4.5,-2.5) L5(-3.5,-2.5) L6(-2.5,-2.5) L7(-1.5,-2.5) L8(-0.5,-2.5) L9(0.5,-2.5) L10(1.5,-2.5) L11(2.5,-2.5) L12(3.5,-2.5) L13(4.5,-2.5) L14(5.5,-2.5) L15(6.5,-2.5) L16(7.5,-2.5) M1(-7.5,-3.5) M2(-6.5,-3.5) M3(-5.5,-3.5) M4(-4.5,-3.5) M5(-3.5,-3.5) M6(-2.5,-3.5) M7(-1.5,-3.5) M8(-0.5,-3.5) M9(0.5,-3.5) M10(1.5,-3.5) M11(2.5,-3.5) M12(3.5,-3.5) M13(4.5,-3.5) M14(5.5,-3.5) M15(6.5,-3.5) M16(7.5,-3.5) N1(-7.5,-4.5) N2(-6.5,-4.5) N3(-5.5,-4.5) N4(-4.5,-4.5) N5(-3.5,-4.5) N6(-2.5,-4.5) N7(-1.5,-4.5) N8(-0.5,-4.5) N9(0.5,-4.5) N10(1.5,-4.5) N11(2.5,-4.5) N12(3.5,-4.5) N13(4.5,-4.5) N14(5.5,-4.5) N15(6.5,-4.5) N16(7.5,-4.5) P1(-7.5,-5.5) P2(-6.5,-5.5) P3(-5.5,-5.5) P4(-4.5,-5.5) P5(-3.5,-5.5) P6(-2.5,-5.5) P7(-1.5,-5.5) P8(-0.5,-5.5) P9(0.5,-5.5) P10(1.5,-5.5) P11(2.5,-5.5) P12(3.5,-5.5) P13(4.5,-5.5) P14(5.5,-5.5) P15(6.5,-5.5) P16(7.5,-5.5) R1(-7.5,-6.5) R2(-6.5,-6.5) R3(-5.5,-6.5) R4(-4.5,-6.5) R5(-3.5,-6.5) R6(-2.5,-6.5) R7(-1.5,-6.5) R8(-0.5,-6.5) R9(0.5,-6.5) R10(1.5,-6.5) R11(2.5,-6.5) R12(3.5,-6.5) R13(4.5,-6.5) R14(5.5,-6.5) R15(6.5,-6.5) R16(7.5,-6.5) T1(-7.5,-7.5) T2(-6.5,-7.5) T3(-5.5,-7.5) T4(-4.5,-7.5) T5(-3.5,-7.5) T6(-2.5,-7.5) T7(-1.5,-7.5) T8(-0.5,-7.5) T9(0.5,-7.5) T10(1.5,-7.5) T11(2.5,-7.5) T12(3.5,-7.5) T13(4.5,-7.5) T14(5.5,-7.5) T15(6.5,-7.5) T16(7.5,-7.5)
  silkscreen extent -9.27,-8.5 8.5,8.5, body extent -8.5,-8.5 8.5,8.5, height 1.55
FXO-HC73 [mm] "MEMS oscillator 7x5 mm industry standard package"
  rect 2x1.8 smd: 1(1.016,-0.889) 2(1.016,-5.969) 3(5.216,-5.969) 4(5.216,-0.889)
  round 0.3 on Top Overlay: 3(-0.381,0.508)
  body extent 0.5,-7.18 5.72,0.32, height 1.4
HEADER_1X2 [mil]
  rect 60x60 hole 35.43: 1(0,0)
  round 60 hole 35.43: 2(100,0)
  silkscreen extent -50,-50 150,50
HEADER_1X9 [mil]
  rect 60x60 hole 35.43: 1(0,0)
  round 60 hole 35.43: 2(100,0) 3(200,0) 4(300,0) 5(400,0) 6(500,0) 7(600,0) 8(700,0) 9(800,0)
  silkscreen extent -50,-50 850,50
HEADER_2X3 [mil]
  rect 60x60 hole 35.43: 1(0,0)
  round 60 hole 35.43: 2(0,100) 3(100,0) 4(100,100) 5(200,0) 6(200,100)
  silkscreen extent -50,-50 250,150
HEADER_2X5 [mil]
  rect 60x60 hole 35.43: 1(0,0)
  round 60 hole 35.43: 2(0,100) 3(100,0) 4(100,100) 5(200,0) 6(200,100) 7(300,0) 8(300,100) 9(400,0) 10(400,100)
  silkscreen extent -50,-50 450,150
HEADER_2X7 [mil]
  rect 60x60 hole 35.43: 1(0,0)
  round 60 hole 35.43: 2(0,100) 3(100,0) 4(100,100) 5(200,0) 6(200,100) 7(300,0) 8(300,100) 9(400,0) 10(400,100) 11(500,0) 12(500,100) 13(600,0) 14(600,100)
  silkscreen extent -50,-50 650,150
HEADER_2X10 [mil]
  rect 60x60 hole 35.43: 1(0,0)
  round 60 hole 35.43: 2(0,100) 3(100,0) 4(100,100) 5(200,0) 6(200,100) 7(300,0) 8(300,100) 9(400,0) 10(400,100) 11(500,0) 12(500,100) 13(600,0) 14(600,100) 15(700,0) 16(700,100) 17(800,0) 18(800,100) 19(900,0) 20(900,100)
  silkscreen extent -50,-50 950,150
LED [mm]
  rect 0.4x0.5 smd: 1(-0.4,0) 2(0.4,0)
  silkscreen extent -1.35,-1 1.35,1
"Resistor 2012" [mm]
  rect 0.7x1.3 smd: 1(-0.95,0) 2(0.95,0)
  silkscreen extent -3.15,-2.5 3.15,2.5
"Resistor 3216" [mm]
  rect 0.9x1.6 smd: 1(-1.45,0) 2(1.45,0)
  silkscreen extent -3.6,-2.5 3.6,2.5
SOT23-5-127P600-8N [mm]
  rect 1x0.6 smd: 1(-1.15,0.95) 2(-1.15,0) 3(-1.15,-0.95) 4(1.15,-0.95) 5(1.15,0.95)
  silkscreen extent -1.27,-1.5 0.25,1.92, body extent -0.85,-1.5 0.85,1.5, height 1.15
ZIF-15 [mm] "Camera connector"
  rect 0.2x1.3 smd: 1(0,0) 10(9,0)
  oval 0.2x1.3 smd: 2(1,0) 3(2,0) 4(3,0) 5(4,0) 6(5,0) 7(6,0) 8(7,0) 9(8,0) 11(10,0) 12(11,0) 13(12,0) 14(13,0) 15(14,0)
  body extent -2.8,-6.5 16.8,0, height 2.2

## Part data
C1 C2 C9 C11 C24 C31 C37: library part cap_unpol_1608_47uF, "47 uF unpolarized capacitor (1608 size)"
C3 C4 C12 C13 C19 C20 C25 C26 C32 C33 C38 C39: library part cap_unpol_1608_4.7uF, "4.7 uF unpolarized capacitor (1608 size)"
C5 C6 C7 C8 C10 C14 C15 C16 C17 C21 C22 C23 C27 C28 C29 C30 C34 C35 C36 C40 C41 C42 C43: library part cap_unpol_1608_0.47uF, "0.47 uF unpolarized capacitor (1608 size)"
C18: library part cap_unpol_1608_100uF, "100 uF unpolarized capacitor (1608 size)"
C44 C46 C49 C51 C52 C53 C57: library part cap_unpol_1608_1uF, "1 uF unpolarized capacitor (1608 size)"
C45 C50 C67 C68 C69 C72 C73 C74: library part cap_unpol_1608_0.01uF, "0.01 uF unpolarized capacitor (1608 size)"
C47 C48 C54 C55 C56 C59 C60 C61 C62 C63 C64 C65 C71: library part cap_unpol_1608_0.1uF, "0.1 uF unpolarized capacitor (1608 size)"
C58 C66 C70: library part cap_unpol_1608_10uF, "10 uF unpolarized capacitor (1608 size)"
D1: library part disp_led, "disp_led"
J1: library part con_head_1x15pin
J2 J3 J8 J10: library part con_head_2x05pin, "Header 2x05pin"
J4: library part con_head_2x07pin, "Header 2x07pin"
J5 J6 J7: library part con_head_2x03pin, "Header 2x03pin"
J9: library part con_sd_microsd, "con_sd_microsd"
J11: library part con_head_2x10pin
LCD1: library part disp_eink, "disp_eink"
R1 R2 R3 R4 R5 R6 R7 R8 R9 R11 R12 R17: library part res_1608_10kohm, "10 kOhm resistor (1608 metric)"
R10: library part res_1608_150ohm, "150 Ohm resistor (1608 metric)"
R13 R14 R15 R16: library part res_currentsense, "Current sense resistor"
SW1: library part mech_button_spst, "Single Pole Single Throw Push Button"
U1: "Artix-7 FPGA, 170 User I/Os, 0 GTP, 256-Ball BGA, Speed Grade 2, Commercial Grade, Pb-Free"
U2: library part ic_vreg_ldo_1v0_ldk130m10r, "ic_vreg_ldo_1v0_ldk130m10r"
U3 U4 U7 U8: library part ic_currentsense_ina196/197/198, "ic_currentsense_ina196/197/198"
U5: library part ic_vreg_ldo_1v8_ldk130m18r, "ic_vreg_ldo_1v8_ldk130m18r"
U6: library part ic_vreg_ldo_3v3_ldk220m33r, "ic_vreg_ldo_3v3_ldk220m33r"
U9: "EFM32 Giant Gecko, M3 ARM Cortex CPU, 1024 KB Flash, 128 KB RAM, 1.85 - 3.8 V Supply, 48 MHz Max Speed, -40 to 85 degC, 112-Pin BGA, RoHS Compliant"
XO1: library part osc_smd_standard_32.768kHz, "osc_smd_standard_32.768kHz"
XO2 XO3: library part osc_smd_standard_48MHz, "osc_smd_standard_48MHz"

## Via types
v1: diameter 0.4, hole 0.2, Top Layer to Bottom Layer, tented both sides, 258 vias

## Nets (pads, with @x,y where several pads share a name; then routed paths per layer and width w, separated by ;. In a path a pad name is that pad's centre, name@x,y a point inside that pad or via, vN(x,y) a via of type N, cw(c..) or ccw(c..) an arc to the next point about the centre after c; other vN are vias at no path point)
CAMERABUS_CAM1_CN: J1.8 U1.C7 | length 74
  Top Layer w0.1: v1(80.823,57.201) 81.077,57.455 81.312,57.455 U1.C7@81.312,57.706 ; v1(131.902,81.168) J1.8@132.842,81.168
  Internal 2 w0.1: v1(80.823,57.201) 82.415,58.793 82.415,71.721 82.906,72.212 96.469,72.212 109.855,85.598 111.709,85.598 112.09,85.217 127.853,85.217 v1(131.902,81.168)
CAMERABUS_CAM1_CP: J1.9 U1.A3 | length 97.8
  Top Layer w0.1: v1(74.981,53.706) U1.A3@79.312,53.706 ; J1.9@132.842,82.168 v1(133.782,82.169) v1(133.782,82.169)
  Internal 1 w0.1: v1(74.981,53.706) 74.981,77.699 81.966,84.684 112.7,84.684 113.309,85.293 123.266,85.293 125.527,87.554 133.706,87.554 134.137,87.122 134.137,82.525 v1(133.782,82.169)
CAMERABUS_CAM1_DN0: J1.2 U1.C3 | length 90.3
  Top Layer w0.1: v1(81.058,53.213) 81.312,53.467 U1.C3@81.312,53.706 ; v1(131.902,75.168) J1.2@132.842,75.168
  Internal 1 w0.1: v1(86.284,78.715) 89.891,82.321 131.318,82.321 132.258,81.382 132.258,75.524 v1(131.902,75.168)
  Internal 2 w0.1: v1(81.058,53.213) 80.702,52.857 79.654,52.857 77.318,55.194 77.318,73.914 82.118,78.715 v1(86.284,78.715)
CAMERABUS_CAM1_DN1: J1.5 U1.D6 | length 79.9
  Top Layer w0.1: v1(81.813,56.413) 82.019,56.413 U1.D6@82.312,56.706 ; J1.5@132.842,78.168 v1(133.782,78.168)
  Internal 2 w0.1: v1(81.813,56.413) 83.439,58.039 83.439,64.846 86.665,68.072 99.238,68.072 99.543,67.767 99.543,67.564 99.771,67.335 102.413,67.335 102.819,66.929 102.819,62.205 103.048,61.976 126.873,61.976 133.782,68.885 v1(133.782,78.168)
CAMERABUS_CAM1_DP0: J1.3 U1.D5 | length 68.7
  Top Layer w0.1: v1(81.813,54.991) 81.813,55.207 U1.D5@82.312,55.706 ; J1.3@132.842,76.168 133.401,76.168 v1(133.401,75.692)
  Bottom Layer w0.1: v1(81.813,54.991) 83.541,56.718 84.938,56.718 85.446,57.226 85.446,60.404 88.897,63.856 91.973,63.856 92.456,64.338 93.167,64.338 93.675,63.83 95.529,63.83 95.707,64.008 99.06,64.008 99.543,63.525 125.832,63.525 130.785,68.478 130.785,75.209 131.267,75.692 v1(133.401,75.692)
CAMERABUS_CAM1_DP1: J1.6 U1.C6 | length 74.2
  Top Layer w0.1: v1(80.823,56.413) 81.019,56.413 U1.C6@81.312,56.706 ; v1(131.898,79.168) J1.6@132.842,79.168
  Internal 1 w0.1: v1(80.823,56.413) 81.2,56.79 81.2,61.294 80.645,61.849 78.638,61.849 78.41,62.078 78.41,62.992 79.451,64.033 79.451,64.516 80.162,65.227 80.162,67.539 79.962,67.739 79.962,68.275 81.435,69.748 102.032,69.748 102.946,70.663 108.28,70.663 108.864,70.079 115.849,70.079 118.161,72.39 125.984,72.39 131.898,78.304 v1(131.898,79.168)
CAMERABUS_CAM_CLK: J1.12 U1.A4 | length 80.7
  Top Layer w0.1: v1(78.435,74.498) 77.318,73.381 77.318,55.27 77.882,54.706 U1.A4@79.312,54.706 ; v1(131.902,85.168) J1.12@132.842,85.168
  Internal 1 w0.1: v1(78.435,74.498) 86.69,82.753 129.487,82.753 v1(131.902,85.168)
CAMERABUS_CAM_GPIO: J1.11 U1.B4 | length 82.6
  Top Layer w0.1: U1.B4@80.312,54.706 80.696,55.09 80.696,56.058 80.67,56.083 80.213,56.083 79.807,56.49 79.807,56.896 79.502,57.201 78.588,57.201 77.902,57.887 77.902,72.898 92.405,87.401 127.805,87.401 131.039,84.168 J1.11@132.842,84.168
CAMERABUS_SCL0: J1.13 U1.A5 | length 84.4
  Top Layer w0.1: v1(78.257,55.448) 79.054,55.448 U1.A5@79.312,55.706 ; J1.13@132.842,86.168 133.771,86.168 v1(133.782,86.157)
  Internal 2 w0.1: v1(78.257,55.448) 78.257,57.836 79.365,58.944 79.365,65.161 78.461,66.065 78.461,72.847 79.045,73.431 86.538,73.431 103.175,90.068 129.87,90.068 v1(133.782,86.157)
CAMERABUS_SDA0: J1.14 U1.B5 | length 84.1
  Top Layer w0.1: v1(79.629,55.22) 79.826,55.22 U1.B5@80.312,55.706 ; v1(129.921,87.168) J1.14@132.842,87.168
  Internal 1 w0.1: v1(79.629,55.22) 79.096,55.22 78.442,55.873 78.442,58.006 77.902,58.547 77.902,79.172 82.271,83.541 116.383,83.541 117.729,84.887 127.64,84.887 v1(129.921,87.168)
FPGABUS_0: U1.D9 U9.E9 | length 32.1
  Top Layer w0.1: v1(81.788,60.198) 81.82,60.198 U1.D9@82.312,59.706 ; v1(102.438,73.355) 102.641,73.152 102.832,73.152 U9.E9@102.832,72.948
  Bottom Layer w0.1: v1(81.788,60.198) 81.407,60.579 81.407,63.094 81.686,63.373 82.753,63.373 85.192,65.811 89.459,65.811 90.182,65.088 93.962,65.088 98.623,69.748 101.829,69.748 101.981,69.901 101.981,72.695 102.438,73.152 v1(102.438,73.355)
FPGABUS_1: U1.A13 U9.E10 | length 35.1
  Top Layer w0.1: v1(78.816,64.202) U1.A13@79.312,63.706 ; v1(102.382,74.148) 102.432,74.148 U9.E10@102.832,73.748
  Internal 1 w0.1: v1(78.816,64.202) 78.816,65.71 78.466,66.06 78.466,73.269 79.365,74.168 100.214,74.168 100.589,73.793 102.026,73.793 v1(102.382,74.148)
FPGABUS_2: U1.A14 U9.F10 | length 35.4
  Top Layer w0.1: v1(78.266,65.752) U1.A14@79.312,64.706 ; v1(103.226,74.143) 103.237,74.143 U9.F10@103.632,73.748
  Internal 1 w0.1: v1(78.266,65.752) 78.266,73.72 79.045,74.498 102.87,74.498 v1(103.226,74.143)
FPGABUS_3: U1.C14 U9.E11 | length 30
  Top Layer w0.1: U1.C14@81.312,64.706 81.712,65.106 81.712,71.298 85.928,75.514 101.866,75.514 U9.E11@102.832,74.548
FPGABUS_4: U1.B14 U9.A9 | length 28.5
  Top Layer w0.1: v1(79.705,65.313) U1.B14@80.312,64.706 ; v1(99.25,73.33) U9.A9@99.632,72.948
  Internal 1 w0.1: v1(79.705,65.313) 79.705,72.466 80.569,73.33 v1(99.25,73.33)
FPGABUS_5: U1.B15 U9.B9 | length 28.8
  Top Layer w0.1: v1(79.807,73.076) 79.807,66.211 U1.B15@80.312,65.706 ; v1(100.025,73.355) U9.B9@100.432,72.948
  Internal 1 w0.1: v1(79.807,73.076) 80.442,73.711 99.67,73.711 v1(100.025,73.355)
FPGABUS_6: U1.A15 U9.C9 | length 30.8
  Top Layer w0.1: v1(78.816,66.218) 78.816,66.202 U1.A15@79.312,65.706 ; v1(100.825,73.355) U9.C9@101.232,72.948
  Internal 1 w0.1: v1(78.816,66.218) 79.366,66.768 79.366,73.651 79.654,73.939 99.941,73.939 100.525,73.355 v1(100.825,73.355)
FPGABUS_7: U1.C16 U9.D9 | length 27.3
  Top Layer w0.1: U1.C16@81.312,66.706 v1(81.312,72.949) ; v1(101.676,73.304) U9.D9@102.032,72.948
  Internal 1 w0.1: v1(81.312,72.949) 101.321,72.949 v1(101.676,73.304)
FPGABUS_8: U1.B16 U9.B4 | length 21.7
  Top Layer w0.1: U1.B16@80.312,66.706 v1(80.312,67.894) ; v1(100.039,68.555) U9.B4@100.432,68.948
  Internal 1 w0.1: v1(80.312,67.894) 80.972,68.555 v1(100.039,68.555)
FPGABUS_9: U1.C11 U9.A4 | length 21.3
  Top Layer w0.1: U1.C11@81.312,61.706 81.684,62.078 v1(81.763,62.078) ; v1(96.749,66.065) U9.A4@99.632,68.948
  Bottom Layer w0.1: v1(81.763,62.078) 84.573,64.888 94.169,64.888 95.346,66.065 v1(96.749,66.065)
FPGABUS_10: U1.C12 U9.C3 | length 24.9
  Top Layer w0.1: v1(80.823,63.398) 80.823,63.195 U1.C12@81.312,62.706 ; v1(100.838,67.754) U9.C3@101.232,68.148
  Internal 1 w0.1: v1(80.823,63.398) 82.208,63.398 82.487,63.678 86.335,63.678 86.944,64.287 90.243,64.287 90.711,64.756 91.243,64.756 91.447,64.553 94.288,64.553 94.471,64.736 95.571,64.736 95.754,64.553 99.859,64.553 100.305,64.999 100.305,67.221 v1(100.838,67.754)
FPGABUS_11: U1.D13 U9.B3 | length 22.4
  Top Layer w0.1: v1(82.017,64.211) 82.017,64.001 U1.D13@82.312,63.706 ; v1(100.025,67.741) U9.B3@100.432,68.148
  Internal 1 w0.1: v1(82.017,64.211) 82.271,63.957 85.161,63.957 85.759,64.556 89.917,64.556 90.317,64.956 91.361,64.956 91.561,64.756 94.092,64.756 94.271,64.936 95.771,64.936 95.951,64.756 99.162,64.756 100.025,65.62 v1(100.025,67.741)
FPGABUS_12: U1.C13 U9.A3 | length 21.3
  Top Layer w0.1: v1(80.823,64.414) 80.823,64.195 U1.C13@81.312,63.706 ; v1(99.048,67.564) U9.A3@99.632,68.148
  Internal 1 w0.1: v1(80.823,64.414) 83.972,67.564 v1(99.048,67.564)
FPGABUS_13: U1.E12 U9.B2 | length 21.5
  Top Layer w0.1: U1.E12@83.312,62.706 v1(83.801,63.195) ; v1(100.025,63.906) 100.025,66.941 U9.B2@100.432,67.348
  Internal 1 w0.1: v1(83.801,63.195) 86.157,63.195 87.045,64.083 90.321,64.083 90.794,64.556 91.161,64.556 91.364,64.353 94.488,64.353 94.671,64.536 95.188,64.536 95.818,63.906 v1(100.025,63.906)
FPGABUS_14: U1.E13 U9.A2 | length 19.1
  Top Layer w0.1: v1(82.804,64.414) 82.804,64.214 U1.E13@83.312,63.706 ; v1(97.44,65.156) U9.A2@99.632,67.348
  Internal 1 w0.1: v1(82.804,64.414) 83.146,64.756 89.833,64.756 90.233,65.156 92.016,65.156 92.216,64.956 93.892,64.956 94.092,65.156 v1(97.44,65.156)
FPGABUS_15: U1.E11 U9.A1 | length 19.3
  Top Layer w0.1: v1(82.804,62.205) 82.813,62.205 U1.E11@83.312,61.706 ; v1(98.794,65.71) U9.A1@99.632,66.548
  Bottom Layer w0.1: v1(82.804,62.205) 83.744,62.205 86.227,64.688 97.772,64.688 v1(98.794,65.71)